# Altium PCB PowerManagement_Driver.PcbDoc
Units mm, origin at the board's own origin, x right, y up, seen from the top; angles counter-clockwise.
Board outline 37.46 x 40.77 mm, 2 copper layers (Top Layer, Bottom Layer); 4 components, 16 nets, 65 pads, 12 vias.
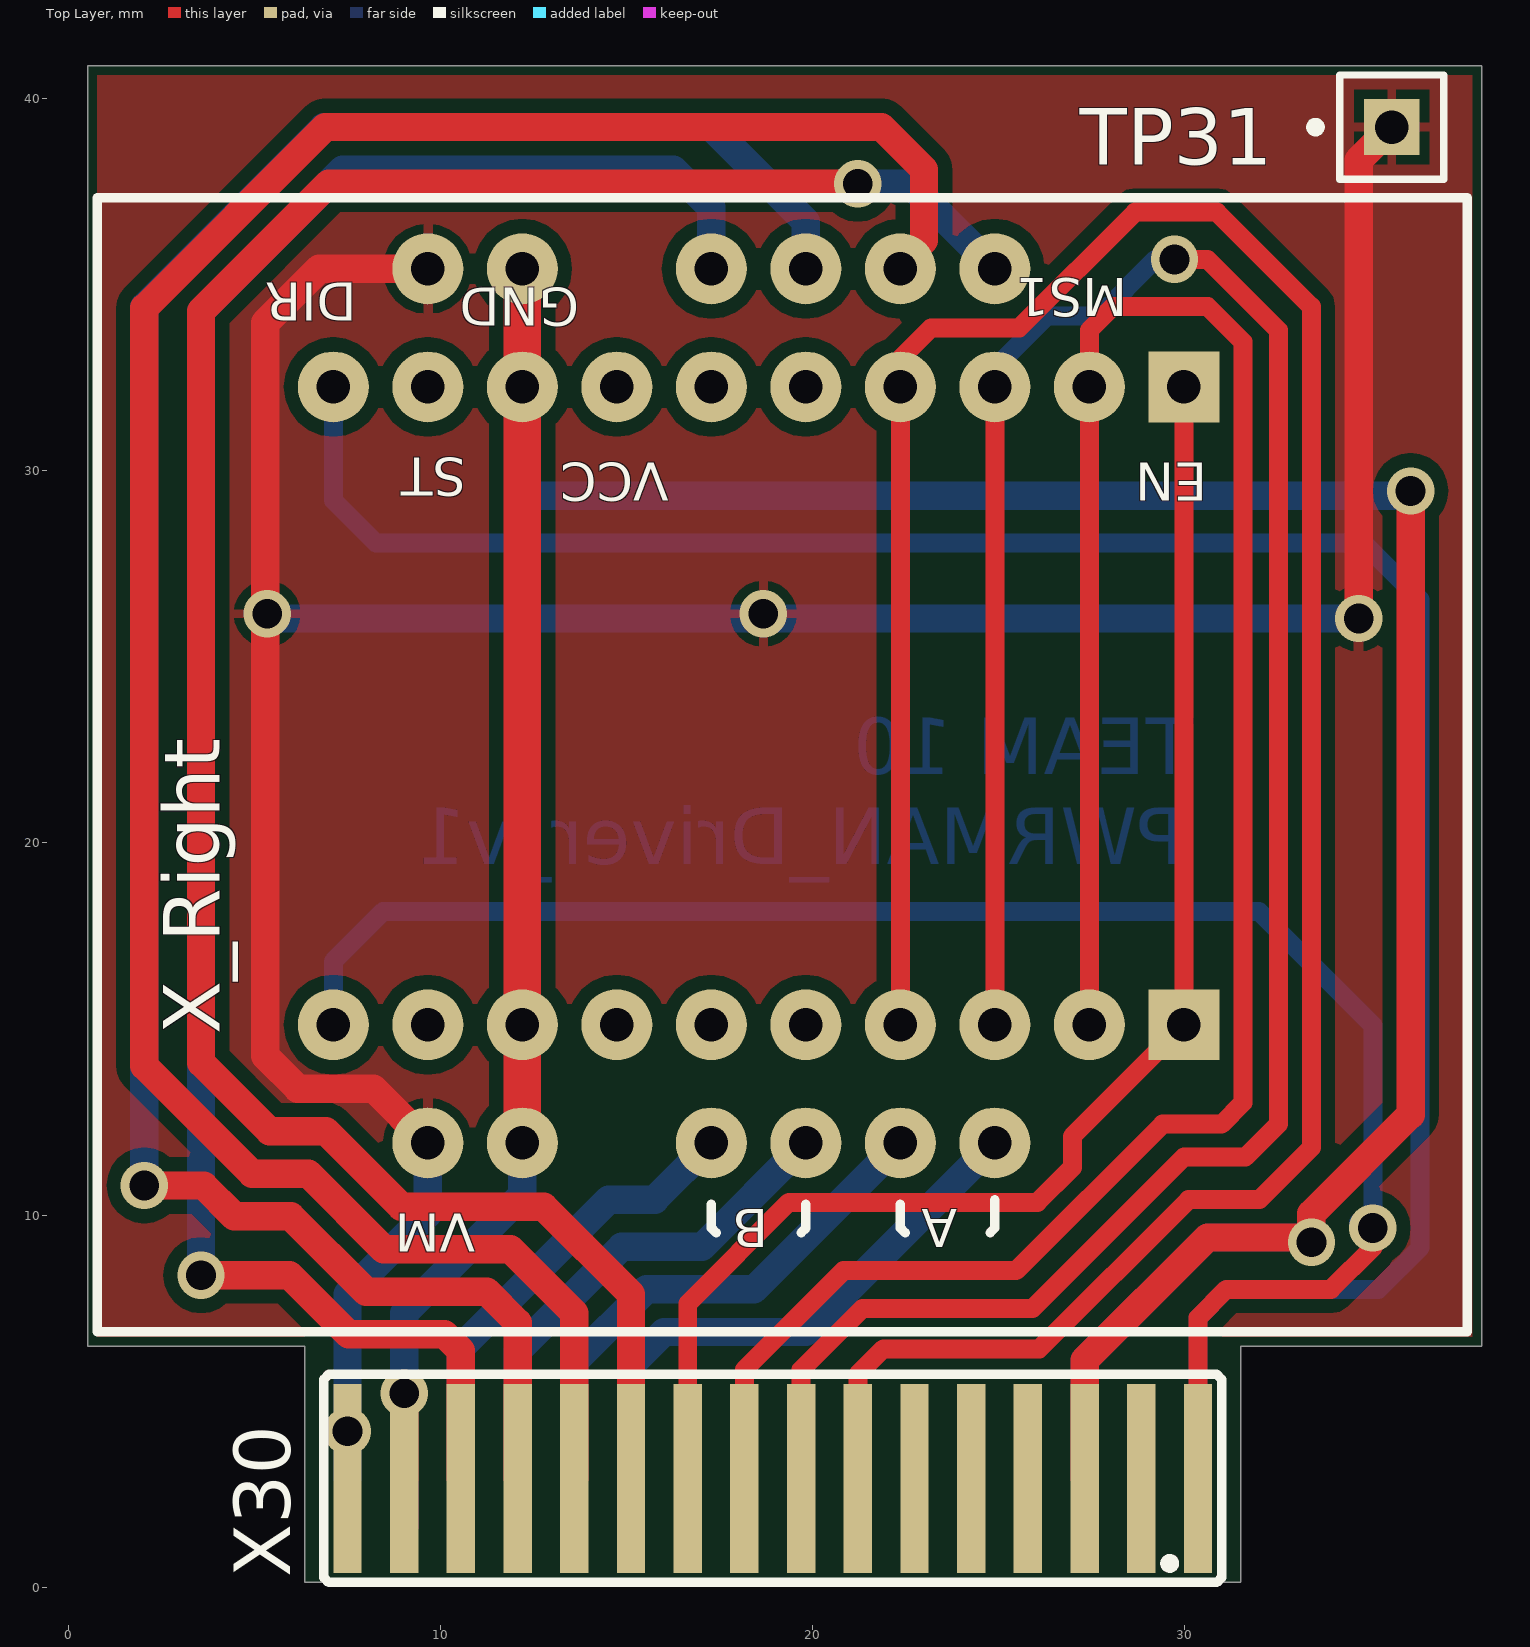
[diagram p0: Top Layer view]
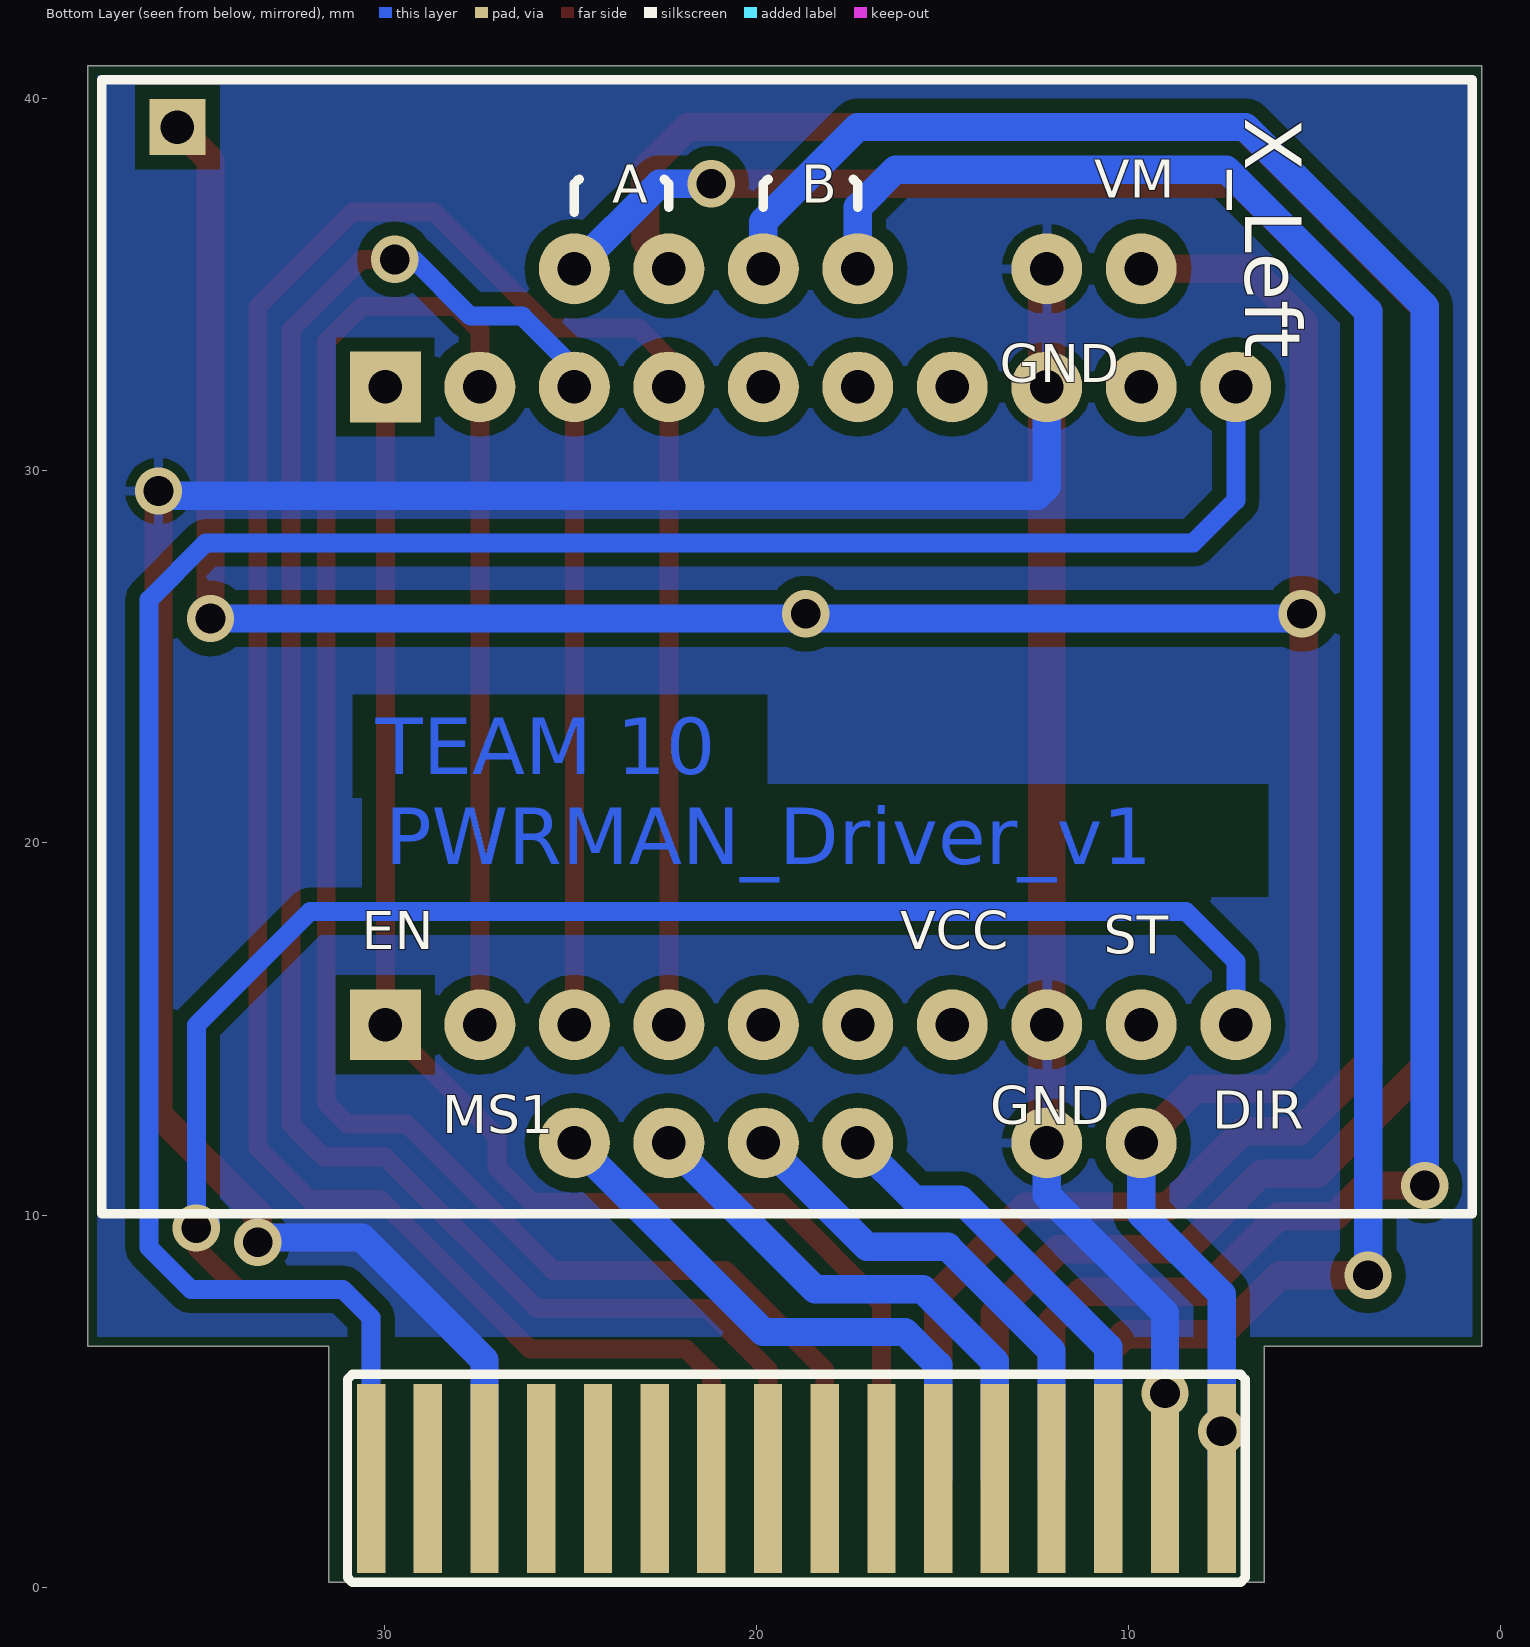
[diagram p1: Bottom Layer view, seen from below]

## Layer stack, top to bottom
Top Solder: solder mask 0.0102, Solder Resist, Dk 3.5
Top Layer: signal copper 0.0356
Dielectric 1: dielectric 0.32, FR-4, Dk 4.8
Bottom Layer: signal copper 0.0356
Bottom Solder: solder mask 0.0102, Solder Resist, Dk 3.5

## Board outline
0.508,6.477 6.35,6.477 6.35,0.127 31.496,0.127 31.496,6.477 37.973,6.477 37.973,40.894 0.508,40.894

## Design rules (kind name [scope] priority, off if disabled: settings)
Clearance [All] p1: gap=0.381
PolygonConnect [All] p1: connectstyle=Relief reliefconductorwidth=0.254 reliefentries=4 polygonreliefangle="90 Angle" airgapwidth=0.254
RoomDefinition PowerManagement_Driver [InComponentClass('PowerManagement_Driver')] p1: confinementstyle=ConfineIn formatcopy=TRUE lockcomponents=FALSE outline 6.35,6.477 6.35,-0.127 31.75,-0.127 31.75,6.477 38.227,6.477 38.227,41.148 0.127,41.148 0.127,6.477
RoutingVias [All] p1: holewidth=0.711 width=1.27 viastyle="Through Hole" minholewidth=0.711 minwidth=1.27 maxholewidth=0.711 maxwidth=1.27
SolderMaskExpansion [All] p1: expansion=0.102
UnpouredPolygon [All] p1: allowunpoured=FALSE
Width [All] p1: maxlimit=1.016 minlimit=0.508 preferedwidth=0.762
29 further rules are at their usual default settings.

## Classes and differential pairs
component class PowerManagement_Driver: TP31 X30 X_Right

## Components (designator, comment, footprint, x,y, rotation, side; value= is the part's Value field where it differs from the comment)
TP31 "" PIN1 35.56,39.243 r90 top
X30 "PCB_CON_32" PCB_CON_32_PLUG 30.861,0.254 r90 top
X_Left "SparkFun Big Easy Driver" SPARKFUN_BIG_EASY_DRIVER 37.592,10.033 r180 bottom
X_Right "SparkFun Big Easy Driver" SPARKFUN_BIG_EASY_DRIVER 37.592,37.338 r180 top

## Footprints (in the part's own frame and the unit in brackets; to place one, negate y for a bottom-side part, rotate by r counter-clockwise, add the part's x,y. Pads: shape width x height; smd on the part's side, far side on the other; paste and mask are expansions set on the pad)
PCB_CON_32_PLUG [mil] "This PCB plug is going to be plugged into a PCB jack"
  rect 200x30 smd: 1(105,20) 2(105,80) 3(105,140) 4(105,200) 5(105,260) 6(105,320) 7(105,380) 8(105,440) 9(105,500) 10(105,560) 11(105,620) 12(105,680) 13(105,740) 14(105,800) 15(105,860) 16(105,920)
  rect 200x30 smd far side: 17(105,920) 18(105,860) 19(105,800) 20(105,740) 21(105,680) 22(105,620) 23(105,560) 24(105,500) 25(105,440) 26(105,380) 27(105,320) 28(105,260) 29(105,200) 30(105,140) 31(105,80) 32(105,20)
  silkscreen extent -5,-5 215,945
PIN1 [mm] "Connector; Plug"
  rect 1.5x1.5 hole 0.9: 1(0,0)
  silkscreen extent -1.4,-1.4 1.4,2.17
SPARKFUN_BIG_EASY_DRIVER [mm] "Driver for stepper motor"
  rect 1.905x1.905 hole 0.9: 1(7.62,5.08)
  round 1.905 hole 0.9: 2(10.16,5.08) 3(12.7,5.08) 4(15.24,5.08) 5(17.78,5.08) 6(20.32,5.08) 7(22.86,5.08) 8(25.4,5.08) 9(27.94,5.08) 10(30.48,5.08) 11(27.94,25.4) 12(25.4,25.4) 13(20.32,25.4) 14(17.78,25.4) 15(15.24,25.4) 16(12.7,25.4)
  silkscreen extent 0,0 36.83,30.48

## Part data
TP31: library part Socket
X30: "Connects a PCB with another. This scheme is either jack or plug, depends on footprint"
X_Left X_Right: "Stepper Motor Driver with 4 wires"

## Via types
v1: diameter 1.27, hole 0.8, Top Layer to Bottom Layer, 12 vias

## Nets (pads, with @x,y where several pads share a name; then routed paths per layer and width w, separated by ;. In a path a pad name is that pad's centre, name@x,y a point inside that pad or via, vN(x,y) a via of type N, cw(c..) or ccw(c..) an arc to the next point about the centre after c; other vN are vias at no path point)
DIR_LEFT: X30.1 X_Left.10 | length 47.9
  Top Layer w0.508: X30.1 30.353,7.239 31.115,8.001 33.927,8.001 35.052,9.126 35.052,9.525 34.925,9.652 v1(35.052,9.652)
  Bottom Layer w0.508: X_Left.10 7.112,16.819 8.454,18.161 31.991,18.161 35.052,15.1 v1(35.052,9.652) 34.798,9.652 34.671,9.779 v1@34.671,9.797
DIR_RIGHT: X30.32 X_Right.10 | length 61.8
  Bottom Layer w0.508: X_Right.10 7.112,29.21 8.255,28.067 34.798,28.067 36.322,26.543 36.322,9.126 35.197,8.001 31.115,8.001 30.353,7.239 X30.32
ENABLE: X30.10 X_Left.1 X_Right.1 | length 38.8
  Top Layer w0.508: X30.10 16.637,7.62 19.355,10.338 26.035,10.338 26.975,11.278 26.975,12.116 X_Left.1 X_Right.1
GND: X30.3 X30.15 X30.18 X30.30 X_Left.8 X_Left.12 X_Right.8 X_Right.12 | length 106.6
  Top Layer w0.762: X30.15@9.017,1.651 v1(9.017,5.207) ; X30.3 27.305,6.096 30.607,9.398 33.401,9.398 33.401,10.033 36.068,12.7 v1(36.068,29.464)
  Top Layer w1.016: X_Right.12 X_Left.8 X_Right.8 X_Left.12
  Bottom Layer w0.762: X30.18 v1(9.017,5.207) 9.017,7.366 12.192,10.541 X_Right.12 ; X_Right.8 12.192,29.591 12.446,29.337 35.941,29.337 v1(36.068,29.464) ; X30.30 27.305,6.096 30.607,9.398 33.274,9.398 v1(33.401,9.271)
MOTOR_LEFT_A1: X30.11 X_Left.16 | length 63
  Top Layer w0.762: X30.11 15.113,7.874 12.763,10.223 8.942,10.223 6.91,12.255 5.397,12.255 3.556,14.097 3.556,34.29 6.985,37.719 v1(21.209,37.719)
  Bottom Layer w0.762: v1(21.209,37.719) 22.606,37.719 X_Left.16
MOTOR_LEFT_A2: X30.12 X_Left.15 | length 65.5
  Top Layer w0.762: X30.12 13.589,7.366 11.874,9.08 8.468,9.08 6.436,11.112 4.924,11.112 2.032,14.005 2.032,34.382 6.893,39.243 21.844,39.243 22.987,38.1 22.987,36.195 22.352,35.56 X_Left.15
MOTOR_LEFT_B1: X30.13 X_Left.14 | length 61.5
  Top Layer w0.762: v1(2.032,10.795) 3.625,10.795 4.451,9.97 5.963,9.97 7.995,7.938 11.239,7.938 12.065,7.112 X30.13
  Bottom Layer w0.762: v1(2.032,10.795) 2.032,34.417 6.858,39.243 17.272,39.243 19.812,36.703 X_Left.14
MOTOR_LEFT_B2: X30.14 X_Left.13 | length 54.5
  Top Layer w0.762: v1(3.556,8.382) 5.934,8.382 7.521,6.794 10.096,6.794 10.541,6.35 X30.14
  Bottom Layer w0.762: v1(3.556,8.382) 3.556,34.29 7.366,38.1 16.256,38.1 17.272,37.084 X_Left.13
MOTOR_RIGHT_A1: X30.22 X_Right.16 | length 15.4
  Bottom Layer w0.508: X_Right.16@24.892,11.811 X_Right.16
  Bottom Layer w0.762: X30.22 15.113,5.969 16.002,6.858 19.812,6.858 X_Right.16
MOTOR_RIGHT_A2: X30.21 X_Right.15 | length 14.3
  Bottom Layer w0.762: X30.21 13.589,6.061 15.529,8.001 18.415,8.001 X_Right.15
MOTOR_RIGHT_B1: X30.20 X_Right.14 | length 13.5
  Bottom Layer w0.762: X30.20 12.065,6.35 14.859,9.144 17.018,9.144 X_Right.14
MOTOR_RIGHT_B2: X30.19 X_Right.13 | length 12.5
  Bottom Layer w0.762: X30.19 10.541,6.442 14.513,10.414 15.748,10.414 X_Right.13
MS1: X30.9 X_Left.2 X_Right.2 | length 63.2
  Top Layer w0.508: X30.9 18.161,5.842 20.828,8.509 25.463,8.509 29.4,12.446 30.988,12.446 31.559,13.018 31.559,33.474 30.616,34.417 28.067,34.417 27.432,33.782 X_Right.2 X_Left.2
MS2: X30.8 X_Left.3 X_Right.3 | length 67.3
  Top Layer w0.508: X30.8 19.685,5.842 21.336,7.493 25.908,7.493 29.972,11.557 31.623,11.557 32.512,12.446 32.512,33.782 30.607,35.687 v1(29.718,35.687) ; X_Left.3 X_Right.3
  Bottom Layer w0.508: X_Left.3@24.892,14.859 X_Left.3 ; X_Right.3 24.892,32.766 26.289,34.163 27.686,34.163 29.21,35.687 v1(29.718,35.687)
MS3: X30.7 X_Left.4 X_Right.4 | length 71.8
  Top Layer w0.508: X30.7 21.209,5.715 21.895,6.401 26.086,6.401 30.099,10.414 32.004,10.414 33.401,11.811 33.401,34.417 30.861,36.957 28.661,36.957 25.55,33.846 23.177,33.846 22.352,33.02 X_Right.4 X_Left.4
VCC_BAT: TP31.1 X30.16 X30.17 X_Left.11 X_Right.11 | length 82.9
  Top Layer w0.762: X_Right.11 8.191,13.399 6.159,13.399 5.283,14.275 5.283,33.985 6.731,35.433 X_Left.11 ; v1(34.671,26.035) 34.671,38.354 TP31.1
  Bottom Layer w0.762: v1(5.334,26.162) 5.461,26.035 v1(34.671,26.035) ; X30.17 7.493,7.874 9.652,10.033 X_Right.11
  other v1: 7.493,4.191 18.669,26.162
pads on no net: X30.2 X30.4 X30.5 X30.6 X30.23 X30.24 X30.25 X30.26 X30.27 X30.28 X30.29 X30.31 X_Left.5 X_Left.6 X_Left.7 X_Left.9 X_Right.5 X_Right.6 X_Right.7 X_Right.9

## Polygon pours and split planes (outlines as drawn)
VCC_BAT on Top Layer "Top_Layer-VCC_BAT" (solid, remove dead copper, pour order 4): 0.762,40.64 37.719,40.64 37.719,6.731 30.345,6.731 20.465,6.731 11.811,6.731 4.403,6.731 2.54,6.731 1.651,6.731 1.016,6.731 0.762,6.731 0.762,6.985
GND on Bottom Layer "Bottom_Layer-GND" (solid, remove dead copper, pour order 9): 0.762,40.64 37.719,40.64 37.719,6.731 0.762,6.731

## Other copper
Bottom Layer:
  text "TEAM 10" at 30.226,21.844 h1.52
  text "PWRMAN_Driver_v1" at 29.972,19.431 h1.52

## Silkscreen, mask and mechanical layers (free items; w line width, h text height)
Mechanical 1:
  the board outline again, w0.254

## Text inside footprints (layer, text, board x,y; h text height)
X_Left: Bottom Overlay "B" at 18.796,37.211 h1.02; Bottom Overlay "EN" at 30.607,17.145 h1.02; Bottom Overlay "MS1" at 28.448,12.192 h1.02; Bottom Overlay "VCC" at 16.129,17.145 h1.02; Bottom Overlay "GND" at 13.716,12.446 h1.02; Bottom Overlay "ST" at 10.668,17.018 h1.02; Bottom Overlay "DIR" at 7.747,12.319 h1.02; Bottom Overlay "VM" at 10.922,37.338 h1.02; Bottom Overlay "GND" at 13.462,32.385 h1.02; Bottom Overlay "A" at 23.876,37.211 h1.02
X_Right: Top Overlay "VM" at 10.922,10.033 h1.02 r180; Top Overlay "ST" at 10.668,30.353 h1.02 r180; Top Overlay "DIR" at 7.747,35.052 h1.02 r180; Top Overlay "VCC" at 16.129,30.226 h1.02 r180; Top Overlay "GND" at 13.716,34.925 h1.02 r180; Top Overlay "B" at 18.796,10.16 h1.02 r180; Top Overlay "A" at 23.876,10.16 h1.02 r180; Top Overlay "EN" at 30.607,30.226 h1.02 r180; Top Overlay "MS1" at 28.448,35.179 h1.02 r180